# EAGLE board CT_schematic (EAGLE 7.6.0)

Size 100 x 80 mm. Coordinates in mm from the lower left corner, seen from the top.
Outline: 0,0 100,0 100,80 0,80 0,0
Copper layers (1*16): Top 0.035mm / dielectric 1.5mm / Bottom 0.035mm
Design rules "default": minimum track width 10mil, minimum drill 24mil, track to track 8mil, track to pad 8mil, pad to pad 8mil, via to via 8mil, smd to smd 8mil, copper to edge 40mil, drill to drill 8mil, minimum pad ring 10mil, minimum via ring 8mil, stop-mask expansion 4mil, vias tented up to drill 0mil, thermal gap 10mil

## Footprints (pad centres in the part's own frame; a part is rotated, then mirrored left to right if it is on the bottom)
C0603 = smd 0.8 x 0.8: 1 -0.762,0; 2 0.762,0
C0402 = smd 0.5 x 0.5: 1 -0.508,0; 2 0.508,0
EXV-9B = smd 2.718 x 1.778: 1 -2.108,0; 2 2.108,0
C1206 = smd 1.3 x 1.6: 1 -1.524,0; 2 1.524,0
C1210 = smd 1.2 x 2.5: 1 -1.524,0; 2 1.524,0
EXV-9H = smd 3.505 x 1.676: 1 -2.857,0; 2 2.857,0
L0603 = smd 0.8 x 0.8: 1 -0.762,0; 2 0.762,0
PJ-037B_PACKAGE = drill 3.7 square: 1 12,0 | drill 3.2 square: 2 6,0
R0603 = smd 0.8 x 0.8: 1 -0.762,0; 2 0.762,0
LQFP144 = smd 0.35 x 1.35: 1 -8.75,-10.625; 2 -8.25,-10.625; 3 -7.75,-10.625; 4 -7.25,-10.625; 5 -6.75,-10.625; 6 -6.25,-10.625; 7 -5.75,-10.625; 8 -5.25,-10.625; 9 -4.75,-10.625; 10 -4.25,-10.625; 11 -3.75,-10.625; 12 -3.25,-10.625; 13 -2.75,-10.62; 14 -2.25,-10.625; 15 -1.75,-10.625; 16 -1.25,-10.625; 17 -0.75,-10.625; 18 -0.25,-10.625; 19 0.25,-10.625; 20 0.75,-10.625; 21 1.25,-10.625; 22 1.75,-10.625; 23 2.25,-10.625; 24 2.75,-10.62; 25 3.25,-10.625; 26 3.75,-10.625; 27 4.25,-10.625; 28 4.75,-10.625; 29 5.25,-10.625; 30 5.75,-10.625; 31 6.25,-10.625; 32 6.75,-10.625; 33 7.25,-10.625; 34 7.75,-10.625; 35 8.25,-10.625; 36 8.75,-10.625; 73 8.75,10.625; 74 8.25,10.625; 75 7.75,10.625; 76 7.25,10.625; 77 6.75,10.625; 78 6.25,10.625; 79 5.75,10.625; 80 5.25,10.625; 81 4.75,10.625; 82 4.25,10.625; 83 3.75,10.625; 84 3.25,10.625; 85 2.75,10.625; 86 2.25,10.625; 87 1.75,10.625; 88 1.25,10.625; 89 0.75,10.625; 90 0.25,10.625; 91 -0.25,10.625; 92 -0.75,10.625; 93 -1.25,10.625; 94 -1.75,10.625; 95 -2.25,10.625; 96 -2.75,10.625; 97 -3.25,10.625; 98 -3.75,10.625; 99 -4.25,10.625; 100 -4.75,10.625; 101 -5.25,10.625; 102 -5.75,10.625; 103 -6.25,10.625; 104 -6.75,10.625; 105 -7.25,10.625; 106 -7.75,10.625; 107 -8.25,10.625; 108 -8.75,10.625 | smd 1.35 x 0.35: 37 10.625,-8.75; 38 10.625,-8.25; 39 10.625,-7.75; 40 10.625,-7.25; 41 10.625,-6.75; 42 10.625,-6.25; 43 10.625,-5.75; 44 10.625,-5.25; 45 10.625,-4.75; 46 10.625,-4.25; 47 10.625,-3.75; 48 10.625,-3.25; 49 10.625,-2.75; 50 10.625,-2.25; 51 10.625,-1.75; 52 10.625,-1.25; 53 10.625,-0.75; 54 10.625,-0.25; 55 10.625,0.25; 56 10.625,0.75; 57 10.625,1.25; 58 10.625,1.75; 59 10.625,2.25; 60 10.625,2.75; 61 10.625,3.25; 62 10.625,3.75; 63 10.625,4.25; 64 10.625,4.75; 65 10.625,5.25; 66 10.625,5.75; 67 10.625,6.25; 68 10.625,6.75; 69 10.625,7.25; 70 10.625,7.75; 71 10.625,8.25; 72 10.625,8.75; 109 -10.625,8.75; 110 -10.625,8.25; 111 -10.625,7.75; 112 -10.625,7.25; 113 -10.625,6.75; 114 -10.625,6.25; 115 -10.625,5.75; 116 -10.625,5.25; 117 -10.625,4.75; 118 -10.625,4.25; 119 -10.625,3.75; 120 -10.625,3.25; 121 -10.625,2.75; 122 -10.625,2.25; 123 -10.625,1.75; 124 -10.625,1.25; 125 -10.625,0.75; 126 -10.625,0.25; 127 -10.625,-0.25; 128 -10.625,-0.75; 129 -10.625,-1.25; 130 -10.625,-1.75; 131 -10.625,-2.25; 132 -10.625,-2.75; 133 -10.625,-3.25; 134 -10.625,-3.75; 135 -10.625,-4.25; 136 -10.625,-4.75; 137 -10.625,-5.25; 138 -10.625,-5.75; 139 -10.625,-6.25; 140 -10.625,-6.75; 141 -10.625,-7.25; 142 -10.625,-7.75; 143 -10.625,-8.25; 144 -10.625,-8.75
SOT-23-6 = smd 1.1 x 0.6: 1 -1.4,0.95; 2 -1.4,0; 3 -1.4,-0.95; 4 1.4,-0.95; 5 1.4,0; 6 1.4,0.95
TDFN-8/6MM = smd 0.3 x 0.75: 1 0,0; 2 0.5,0; 3 1,0; 4 1.5,0; 5 1.5,3; 6 1,3; 7 0.5,3; 8 0,3
SOIC-8 = smd 1.6 x 0.6: 1 -2.7,1.905 | smd 1.55 x 0.6: 2 -2.7,0.635; 3 -2.7,-0.635; 4 -2.7,-1.905; 5 2.7,-1.905; 6 2.7,-0.635; 7 2.7,0.635; 8 2.7,1.905
182-009-MALE = drill 1.194 pad 1.524 octagon: 1 -5.537,10.923; 2 -2.769,10.923; 3 0,10.923; 4 2.769,10.923; 5 5.537,10.923; 6 -4.153,8.08; 7 -1.384,8.08; 8 1.384,8.08; 9 4.153,8.08 | hole 3.048: -12.446,9.501; 12.446,9.501
LBGA-64 = smd 0.559 x 0.559: A1 -3.5,3.5; A2 -2.5,3.5; A3 -1.5,3.5; A4 -0.5,3.5; A5 0.5,3.5; A6 1.5,3.5; A7 2.5,3.5; A8 3.5,3.5; B1 -3.5,2.5; B2 -2.5,2.5; B3 -1.5,2.5; B4 -0.5,2.5; B5 0.5,2.5; B6 1.5,2.5; B7 2.5,2.5; B8 3.5,2.5; C1 -3.5,1.5; C2 -2.5,1.5; C3 -1.5,1.5; C4 -0.5,1.5; C5 0.5,1.5; C6 1.5,1.5; C7 2.5,1.5; C8 3.5,1.5; D1 -3.5,0.5; D2 -2.5,0.5; D3 -1.5,0.5; D4 -0.5,0.5; D5 0.5,0.5; D6 1.5,0.5; D7 2.5,0.5; D8 3.5,0.5; E1 -3.5,-0.5; E2 -2.5,-0.5; E3 -1.5,-0.5; E4 -0.5,-0.5; E5 0.5,-0.5; E6 1.5,-0.5; E7 2.5,-0.5; E8 3.5,-0.5; F1 -3.5,-1.5; F2 -2.5,-1.5; F3 -1.5,-1.5; F4 -0.5,-1.5; F5 0.5,-1.5; F6 1.5,-1.5; F7 2.5,-1.5; F8 3.5,-1.5; G1 -3.5,-2.5; G2 -2.5,-2.5; G3 -1.5,-2.5; G4 -0.5,-2.5; G5 0.5,-2.5; G6 1.5,-2.5; G7 2.5,-2.5; G8 3.5,-2.5; H1 -3.5,-3.5; H2 -2.5,-3.5; H3 -1.5,-3.5; H4 -0.5,-3.5; H5 0.5,-3.5; H6 1.5,-3.5; H7 2.5,-3.5; H8 3.5,-3.5
TFBGA-153 = smd 0.3 x 0.3: A1 -3.25,3.25; A2 -2.75,3.25; A3 -2.25,3.25; A4 -1.75,3.25; A5 -1.25,3.25; A6 -0.75,3.25; A7 -0.25,3.25; A8 0.25,3.25; A9 0.75,3.25; A10 1.25,3.25; A11 1.75,3.25; A12 2.25,3.25; A13 2.75,3.25; A14 3.25,3.25; B1 -3.25,2.75; B2 -2.75,2.75; B3 -2.25,2.75; B4 -1.75,2.75; B5 -1.25,2.75; B6 -0.75,2.75; B7 -0.25,2.75; B8 0.25,2.75; B9 0.75,2.75; B10 1.25,2.75; B11 1.75,2.75; B12 2.25,2.75; B13 2.75,2.75; B14 3.25,2.75; C1 -3.25,2.25; C2 -2.75,2.25; C3 -2.25,2.25; C4 -1.75,2.25; C5 -1.25,2.25; C6 -0.75,2.25; C7 -0.25,2.25; C8 0.25,2.25; C9 0.75,2.25; C10 1.25,2.25; C11 1.75,2.25; C12 2.25,2.25; C13 2.75,2.25; C14 3.25,2.25; D1 -3.25,1.75; D2 -2.75,1.75; D3 -2.25,1.75; D4 -1.75,1.75; D12 2.25,1.75; D13 2.75,1.75; D14 3.25,1.75; E1 -3.25,1.25; E2 -2.75,1.25; E3 -2.25,1.25; E5 -1.25,1.25; E6 -0.75,1.25; E7 -0.25,1.25; E8 0.25,1.25; E9 0.75,1.25; E10 1.25,1.25; E12 2.25,1.25; E13 2.75,1.25; E14 3.25,1.25; F1 -3.25,0.75; F2 -2.75,0.75; F3 -2.25,0.75; F5 -1.25,0.75; F10 1.25,0.75; F12 2.25,0.75; F13 2.75,0.75; F14 3.25,0.75; G1 -3.25,0.25; G2 -2.75,0.25; G3 -2.25,0.25; G5 -1.25,0.25; G10 1.25,0.25; G12 2.25,0.25; G13 2.75,0.25; G14 3.25,0.25; H1 -3.25,-0.25; H2 -2.75,-0.25; H3 -2.25,-0.25; H5 -1.25,-0.25; H10 1.25,-0.25; H12 2.25,-0.25; H13 2.75,-0.25; H14 3.25,-0.25; J1 -3.25,-0.75; J2 -2.75,-0.75; J3 -2.25,-0.75; J5 -1.25,-0.75; J10 1.25,-0.75; J12 2.25,-0.75; J13 2.75,-0.75; J14 3.25,-0.75; K1 -3.25,-1.25; K2 -2.75,-1.25; K3 -2.25,-1.25; K5 -1.25,-1.25; K6 -0.75,-1.25; K7 -0.25,-1.25; K8 0.25,-1.25; K9 0.75,-1.25; K10 1.25,-1.25; K12 2.25,-1.25; K13 2.75,-1.25; K14 3.25,-1.25; L1 -3.25,-1.75; L2 -2.75,-1.75; L3 -2.25,-1.75; L12 2.25,-1.75; L13 2.75,-1.75; L14 3.25,-1.75; M1 -3.25,-2.25; M2 -2.75,-2.25; M3 -2.25,-2.25; M4 -1.75,-2.25; M5 -1.25,-2.25; M6 -0.75,-2.25; M7 -0.25,-2.25; M8 0.25,-2.25; M9 0.75,-2.25; M10 1.25,-2.25; M11 1.75,-2.25; M12 2.25,-2.25; M13 2.75,-2.25; M14 3.25,-2.25; N1 -3.25,-2.75; N2 -2.75,-2.75; N3 -2.25,-2.75; N4 -1.75,-2.75; N5 -1.25,-2.75; N6 -0.75,-2.75; N7 -0.25,-2.75; N8 0.25,-2.75; N9 0.75,-2.75; N10 1.25,-2.75; N11 1.75,-2.75; N12 2.25,-2.75; N13 2.75,-2.75; N14 3.25,-2.75; P1 -3.25,-3.25; P2 -2.75,-3.25; P3 -2.25,-3.25; P4 -1.75,-3.25; P5 -1.25,-3.25; P6 -0.75,-3.25; P7 -0.25,-3.25; P8 0.25,-3.25; P9 0.75,-3.25; P10 1.25,-3.25; P11 1.75,-3.25; P12 2.25,-3.25; P13 2.75,-3.25; P14 3.25,-3.25
MICRO_USB_AB = smd 0.4 x 1.35: 1 1.3,0.26; 2 0.65,0.26; 3 0,0.26; 4 -0.65,0.26; 5 -1.3,0.26 | drill 0.6 pad 0.95 long: 6 4.175,-2.54; 7 -4.175,-2.54 | drill 0.7 pad 1.1 long: 8 -2.225,0.46; 9 2.225,0.46
SOT143B = smd 1 x 0.7: 1 -0.75,-1 | smd 0.6 x 0.7: 2 0.95,-1; 3 0.95,1; 4 -0.95,1
ABLS-25.000MHZ-B2F-T = smd 5.6 x 2.8: 1 -3.81,0; 2 5.69,0
ASEK = smd 1.4 x 1: 1 -1.1,-0.8; 2 1.1,-0.8; 3 1.1,0.8; 4 -1.1,0.8
LP2954 = smd 1.6 x 0.6: 1 -2.475,1.905 | smd 1.55 x 0.6: 2 -2.475,0.635; 3 -2.475,-0.635; 4 -2.475,-1.905; 5 2.475,-1.905; 6 2.475,-0.635; 7 2.475,0.635; 8 2.475,1.905
WSON-8 = smd 0.3 x 0.6: 1 -0.75,0; 2 0.05,0; 3 0.85,0; 4 1.65,0; 5 1.65,3.8; 6 0.85,3.8; 7 0.05,3.8; 8 -0.75,3.8 | smd 3 x 2.6: PAD 0.45,1.9
SON-6 = smd 0.55 x 0.3: 1 -0.355,0.5 | smd 0.52 x 0.3: 2 -0.37,0; 3 -0.37,-0.5; 4 0.37,-0.5; 5 0.37,0; 6 0.37,0.5
SW_4-1437565-2 = smd 1.4 x 2.1: 1 -2.23,4.55; 2 -2.23,-4.55; 3 2.23,4.55; 4 2.23,-4.55
LGM67K-G1J2-24-Z = smd 0.8 x 1.4: A -2,0; C 0,0
NC7SZ125M5X = smd 1.3 x 0.7: 1 -1.3,0.95; 2 -1.3,0; 3 -1.3,-0.95; 4 1.3,-0.95; 5 1.3,0.95

## Placement (x,y rotation side)
C1  1e-06  [C0603]  -57.15,83.82 0 top  (outside the outline)
C2  1e-07  [C0603]  -60.96,83.82 0 top  (outside the outline)
C3  1e-07  [C0603]  -64.77,83.82 0 top  (outside the outline)
C4  1e-07  [C0603]  -68.58,83.82 0 top  (outside the outline)
C5  1e-07  [C0603]  -72.39,83.82 0 top  (outside the outline)
C6  1e-07  [C0603]  -76.2,83.82 0 top  (outside the outline)
C7  1e-07  [C0603]  -80.01,83.82 0 top  (outside the outline)
C8  1e-07  [C0603]  -83.82,83.82 0 top  (outside the outline)
C9  1e-07  [C0603]  -15.24,88.9 0 top  (outside the outline)
C10  1e-07  [C0603]  -19.05,88.9 0 top  (outside the outline)
C11  1e-07  [C0603]  -22.86,88.9 0 top  (outside the outline)
C12  1e-07  [C0603]  -26.67,88.9 0 top  (outside the outline)
C13  1e-07  [C0603]  -30.48,88.9 0 top  (outside the outline)
C14  4.7e-06  [C0603]  -34.29,83.82 0 top  (outside the outline)
C15  2.2e-06  [C0603]  -38.1,83.82 0 top  (outside the outline)
C16  2.2e-06  [C0603]  -41.91,83.82 0 top  (outside the outline)
C17  1e-08  [C0603]  -34.29,88.9 0 top  (outside the outline)
C18  1e-06  [C0603]  -38.1,88.9 0 top  (outside the outline)
C19  1e-11  [C0402]  -19.05,93.98 0 top  (outside the outline)
C20  1e-11  [C0402]  -22.86,93.98 0 top  (outside the outline)
C21  1e-08  [C0402]  -26.67,93.98 0 top  (outside the outline)
C22  1e-06  [C0603]  -41.91,88.9 0 top  (outside the outline)
C23  1e-06  [C0603]  -45.72,88.9 0 top  (outside the outline)
C24  1e-08  [C0402]  -30.48,93.98 0 top  (outside the outline)
C25  1e-08  [C0402]  -34.29,93.98 0 top  (outside the outline)
C26  1e-07  [C0402]  -38.1,93.98 0 top  (outside the outline)
C27  2.2e-06  [C0603]  -45.72,83.82 0 top  (outside the outline)
C28  2.2e-06  [C0603]  -49.53,83.82 0 top  (outside the outline)
C29  1e-07  [C0402]  -41.91,93.98 0 top  (outside the outline)
C30  1e-07  [C0402]  -45.72,93.98 0 top  (outside the outline)
C31  2.2e-06  [C0603]  -53.34,83.82 0 top  (outside the outline)
C32  1e-08  [C0402]  -49.53,93.98 0 top  (outside the outline)
C33  1e-06  [EXV-9B]  -63.5,64.77 0 top  (outside the outline)
C34  2.2e-06  [EXV-9B]  -72.39,64.77 0 top  (outside the outline)
C35  1e-08  [C0402]  -53.34,93.98 0 top  (outside the outline)
C36  1e-05  [C1206]  -55.88,64.77 0 top  (outside the outline)
C37  1e-05  [C1210]  -49.53,66.04 0 top  (outside the outline)
C38  1e-07  [C0402]  -57.15,93.98 0 top  (outside the outline)
C39  0.0001  [EXV-9H]  -58.42,57.15 0 top  (outside the outline)
C40  0.0001  [EXV-9H]  -69.85,57.15 0 top  (outside the outline)
C41  1e-08  [C0402]  -60.96,93.98 0 top  (outside the outline)
C42  1e-08  [C0402]  -64.77,93.98 0 top  (outside the outline)
C43  1e-08  [C0402]  -68.58,93.98 0 top  (outside the outline)
F1  240.0  [L0603]  -49.53,88.9 0 top  (outside the outline)
J1  PJ-037B  [PJ-037B_PACKAGE]  -55.88,30.48 0 top  (outside the outline)
R2  1000.0  [R0603]  -53.34,88.9 0 top  (outside the outline)
R4  4700.0  [R0603]  -57.15,88.9 0 top  (outside the outline)
R5  4700.0  [R0603]  -60.96,88.9 0 top  (outside the outline)
R6  4700.0  [R0603]  -64.77,88.9 0 top  (outside the outline)
R7  2200.0  [R0603]  -68.58,88.9 0 top  (outside the outline)
R8  2200.0  [R0603]  -72.39,88.9 0 top  (outside the outline)
R9  47000.0  [R0603]  -71.12,72.39 0 top  (outside the outline)
R10  10000.0  [R0603]  -76.2,72.39 0 top  (outside the outline)
R11  10000.0  [R0603]  -81.28,72.39 0 top  (outside the outline)
R12  10000.0  [R0603]  -15.24,78.74 0 top  (outside the outline)
R13  120.0  [R0603]  -76.2,88.9 0 top  (outside the outline)
R14  10000.0  [R0603]  -20.32,78.74 0 top  (outside the outline)
R15  10000.0  [R0603]  -25.4,78.74 0 top  (outside the outline)
R16  10000.0  [R0603]  -30.48,78.74 0 top  (outside the outline)
R17  10000.0  [R0603]  -35.56,78.74 0 top  (outside the outline)
R18  10000.0  [R0603]  -40.64,78.74 0 top  (outside the outline)
R19  34000.0  [R0603]  -45.72,78.74 0 top  (outside the outline)
R20  34000.0  [R0603]  -50.8,78.74 0 top  (outside the outline)
R21  34000.0  [R0603]  -55.88,78.74 0 top  (outside the outline)
R22  34000.0  [R0603]  -60.96,78.74 0 top  (outside the outline)
R23  34000.0  [R0603]  -66.04,78.74 0 top  (outside the outline)
R24  34000.0  [R0603]  -71.12,78.74 0 top  (outside the outline)
R25  34000.0  [R0603]  -76.2,78.74 0 top  (outside the outline)
R26  34000.0  [R0603]  -81.28,78.74 0 top  (outside the outline)
R27  34000.0  [R0603]  -15.24,83.82 0 top  (outside the outline)
R28  34000.0  [R0603]  -20.32,83.82 0 top  (outside the outline)
R29  100000.0  [R0603]  -40.64,72.39 0 top  (outside the outline)
R30  100000.0  [R0603]  -45.72,72.39 0 top  (outside the outline)
R31  164658.62  [R0603]  -35.56,72.39 0 top  (outside the outline)
R32  100000.0  [R0603]  -50.8,72.39 0 top  (outside the outline)
R33  100000.0  [R0603]  -55.88,72.39 0 top  (outside the outline)
R34  3900.0  [R0603]  -80.01,88.9 0 top  (outside the outline)
R35  1000.0  [R0603]  -83.82,88.9 0 top  (outside the outline)
R36  10000.0  [R0603]  -25.4,83.82 0 top  (outside the outline)
R37  10000.0  [R0603]  -30.48,83.82 0 top  (outside the outline)
R38  9100.0  [R0603]  -15.24,93.98 0 top  (outside the outline)
R39  680000.0  [R0603]  -60.96,72.39 0 top  (outside the outline)
R40  120000.0  [R0603]  -66.04,72.39 0 top  (outside the outline)
U1  STM32F215ZET6  [LQFP144]  -24.13,11.43 0 top  (outside the outline)
U2  MAX4995AAUT+T  [SOT-23-6]  -80.01,64.77 0 top  (outside the outline)
U3  24AA01T-I/MNY  [TDFN-8/6MM]  -43.18,44.45 0 top  (outside the outline)
U4  MCP2562-E/SN  [SOIC-8]  -72.39,45.72 0 top  (outside the outline)
U5  182-009-113R531  [182-009-MALE]  -59.69,6.35 0 top  (outside the outline)
U6  mt28ew512aba1HPC-0AAT  [LBGA-64]  -33.02,30.48 0 top  (outside the outline)
U7  mtfc4gmcdm  [TFBGA-153]  -20.32,31.75 0 top  (outside the outline)
U8  47590-0001  [MICRO_USB_AB]  -64.77,30.48 0 top  (outside the outline)
U9  prtr5v0u2ax  [SOT143B]  -81.28,93.98 0 top  (outside the outline)
U10  ABLS-25.000MHZ-B2F-T  [ABLS-25.000MHZ-B2F-T]  -26.67,66.04 0 top  (outside the outline)
U11  ASEK-32.768KHz-ECST  [ASEK]  -49.53,57.15 0 top  (outside the outline)
U12  LP2954AIMX/NOPB  [LP2954]  -58.42,45.72 0 top  (outside the outline)
U13  LP3878SDX-ADJ/NOPB  [WSON-8]  -30.48,55.88 0 top  (outside the outline)
U14  TPS3895ADRYR  [SON-6]  -13.97,97.79 0 top  (outside the outline)
U15  4-1437565-2  [SW_4-1437565-2]  -27.94,46.99 0 top  (outside the outline)
U16  Q65110A2395  [LGM67K-G1J2-24-Z]  -38.1,66.04 0 top  (outside the outline)
U17  nc7sz125m5x  [NC7SZ125M5X]  -15.24,72.39 0 top  (outside the outline)
U18  nc7sz125m5x  [NC7SZ125M5X]  -21.59,72.39 0 top  (outside the outline)
U19  nc7sz125m5x  [NC7SZ125M5X]  -27.94,72.39 0 top  (outside the outline)

## Library data of the parts
C1-C43 F1 J1 R2 R4-R40 U1-U19 = circuit_tree

## Nets
CLK_CRYSTAL_U1_23: C19.1 U1.23 U10.1
CLK_CRYSTAL_U1_24: C20.1 U1.24 U10.2
CLK_U1_8: U1.8 U11.3
GND: C1.2 C2.2 C3.2 C4.2 C5.2 C6.2 C7.2 C8.2 C9.2 C10.2 C11.2 C12.2 C13.2 C14.2 C15.2 C16.2 C17.2 C18.2 C19.2 C20.2 C21.2 C22.2 C23.2 C24.2 C25.2 C26.2 C27.2 C28.2 C29.2 C30.2 C31.2 C32.2 C33.2 C34.2 C35.2 C36.2 C37.2 C38.2 C39.2 C40.2 C41.2 C42.2 C43.2 J1.2 R2.2 R9.2 R10.2 R12.2 R32.2 R35.2 R38.2 R40.2 U1.16 U1.31 U1.38 U1.51 U1.61 U1.83 U1.94 U1.107 U1.120 U1.130 U2.2 U3.4 U4.2 U4.8 U5.5 U6.E8 U6.H2 U6.H7 U7.C4 U7.E7 U7.G5 U7.H10 U7.K8 U7.N2 U7.N5 U7.P4 U7.P6 U8.5 U8.6 U8.7 U8.8 U8.9 U9.1 U11.2 U12.4 U13.3 U13.PAD U14.2 U16.C U17.1 U17.3 U18.1 U18.3 U19.1 U19.3
NET_U1_25: R6.1 U1.25 U19.4
NET_U1_33: C17.1 C18.1 F1.1 U1.32 U1.33
NET_U1_71: C15.1 U1.71
NET_U1_106: C16.1 U1.106
NET_U1_136: R7.1 U1.136 U3.6
NET_U1_137: R8.1 U1.137 U3.5
NET_U1_138: R10.1 U1.138
NET_U1_141: U16.A
NET_U1_142: U15.3 U15.4
NET_U2_1: U1.101 U2.1
NET_U2_3: R9.1 U2.3
NET_U4_6: R13.2 U4.6
NET_U5_2: R13.2 U4.6 U5.2
NET_U5_3: R13.1 U4.7 U5.3
NET_U6_B4: R17.1 U6.B4
NET_U6_B5: R4.1 U6.B5 U17.4
NET_U6_F7: R18.1 U6.F7
NET_U7_C2: C28.1 C29.1 U7.C2
NET_U7_K5: R5.1 U7.K5 U18.4
NET_U12_3: R30.1 U12.3
NET_U12_5: R29.1 U12.5
NET_U12_7: R31.2 R32.1 U12.7
NET_U13_1: C35.1 U13.1
NET_U13_6: R34.2 R35.1 U13.6
NET_U13_8: R33.1 U13.8
NET_U14_1: R37.1 R38.1 U14.1
NET_U14_3: R39.2 R40.1 U14.3
NET_U14_4: R36.1 U14.4 U17.2 U18.2 U19.2
NET_U15_1: R2.1 U15.1 U15.2
PROC_CAN1_RX: U1.103 U4.4
PROC_CAN1_TX: U1.104 U4.1
PROC_FSMC_A0: U1.10 U6.E2
PROC_FSMC_A1: U1.11 U6.D2
PROC_FSMC_A2: U1.12 U6.C2
PROC_FSMC_A3: U1.13 U6.A2
PROC_FSMC_A4: U1.14 U6.B2
PROC_FSMC_A5: U1.15 U6.D3
PROC_FSMC_A6: U1.50 U6.C3
PROC_FSMC_A7: U1.53 U6.A3
PROC_FSMC_A8: U1.54 U6.B6
PROC_FSMC_A9: U1.55 U6.A6
PROC_FSMC_A10: U1.56 U6.C6
PROC_FSMC_A11: U1.57 U6.D6
PROC_FSMC_A12: U1.87 U6.B7
PROC_FSMC_A13: U1.88 U6.A7
PROC_FSMC_A14: U1.89 U6.C7
PROC_FSMC_A15: U1.90 U6.D7
PROC_FSMC_A16: U1.80 U6.E7
PROC_FSMC_A17: U1.81 U6.B3
PROC_FSMC_A18: U1.82 U6.C4
PROC_FSMC_A19: U1.2 U6.D5
PROC_FSMC_A20: U1.3 U6.D4
PROC_FSMC_A21: U1.4 U6.C5
PROC_FSMC_A22: U1.5 U6.B8
PROC_FSMC_A23: U1.1 U6.C8
PROC_FSMC_A24: U1.128 U6.F8
PROC_FSMC_D0: U1.85 U6.E3
PROC_FSMC_D1: U1.86 U6.H3
PROC_FSMC_D2: U1.114 U6.E4
PROC_FSMC_D3: U1.115 U6.H4
PROC_FSMC_D4: U1.58 U6.H5
PROC_FSMC_D5: U1.59 U6.E5
PROC_FSMC_D6: U1.60 U6.H6
PROC_FSMC_D7: U1.63 U6.E6
PROC_FSMC_D8: U1.64 U6.F3
PROC_FSMC_D9: U1.65 U6.G3
PROC_FSMC_D10: U1.66 U6.F4
PROC_FSMC_D11: U1.67 U6.G4
PROC_FSMC_D12: U1.68 U6.F5
PROC_FSMC_D13: U1.77 U6.G6
PROC_FSMC_D14: U1.78 U6.F6
PROC_FSMC_D15: U1.79 U6.G7
PROC_FSMC_NE4: R14.1 U1.127 U6.F2
PROC_FSMC_NOE: R15.1 U1.118 U6.G2
PROC_FSMC_NWAIT: U1.122 U6.A4
PROC_FSMC_NWE: R16.1 U1.119 U6.A5
PROC_GPIO_TO_U1_USB_FAULT: R11.1 U1.9 U2.6
PROC_GPIO_TO_U1_VBUS_EN: R12.1 U1.7 U2.4
PROC_SDIO_CK: R28.1 U1.113 U7.M6
PROC_SDIO_CMD: R27.1 U1.116 U7.M5
PROC_SDIO_D0: R19.1 U1.98 U7.A3
PROC_SDIO_D1: R20.1 U1.99 U7.A4
PROC_SDIO_D2: R21.1 U1.111 U7.A5
PROC_SDIO_D3: R22.1 U1.112 U7.B2
PROC_SDIO_D4: R23.1 U1.139 U7.B3
PROC_SDIO_D5: R24.1 U1.140 U7.B4
PROC_SDIO_D6: R25.1 U1.96 U7.B5
PROC_SDIO_D7: R26.1 U1.97 U7.B6
PROC_USB_OTG_HS_DM: U1.75 U8.2 U9.3
PROC_USB_OTG_HS_DP: U1.76 U8.3 U9.2
PROC_USB_OTG_HS_ID: U1.73 U8.4
PROC_USB_OTG_HS_VBUS: U1.74 U8.1 U9.4
VCC_S1_10V6: C33.1 C36.1 C39.1 C40.1 J1.1 R30.2 R33.2 U12.8 U13.4
VCC_TIER1_3V3: C1.1 C2.1 C3.1 C4.1 C5.1 C6.1 C7.1 C8.1 C9.1 C10.1 C11.1 C12.1 C13.1 C14.1 C21.1 C23.1 C24.1 C25.1 C26.1 C27.1 C30.1 C31.1 C32.1 C34.1 C38.1 C41.1 C42.1 C43.1 F1.2 R4.2 R5.2 R6.2 R7.2 R8.2 R11.2 R14.2 R15.2 R16.2 R17.2 R18.2 R19.2 R20.2 R21.2 R22.2 R23.2 R24.2 R25.2 R26.2 R27.2 R28.2 R29.2 R31.1 R36.2 R37.2 R39.1 U1.6 U1.17 U1.30 U1.39 U1.52 U1.62 U1.72 U1.84 U1.95 U1.108 U1.121 U1.131 U1.144 U3.7 U3.8 U4.5 U6.D8 U6.F1 U6.G5 U7.C6 U7.E6 U7.F5 U7.J10 U7.K9 U7.M4 U7.N4 U7.P3 U7.P5 U11.4 U12.1 U14.6 U17.5 U18.5 U19.5
VCC_TIER1_5V0: C22.1 C37.1 R34.1 U2.5 U4.3 U13.5

## Tracks (layer width: path | path; a pad name or v marks a point on that pad's centre or on a via)
CLK_CRYSTAL_U1_23  (2 unrouted)
CLK_CRYSTAL_U1_24  (2 unrouted)
CLK_U1_8  (1 unrouted)
GND  (96 unrouted)
NET_U1_25  (2 unrouted)
NET_U1_33  (4 unrouted)
NET_U1_71  (1 unrouted)
NET_U1_106  (1 unrouted)
NET_U1_136  (2 unrouted)
NET_U1_137  (2 unrouted)
NET_U1_138  (1 unrouted)
NET_U1_142  (1 unrouted)
NET_U2_1  (1 unrouted)
NET_U2_3  (1 unrouted)
NET_U4_6  (1 unrouted)
NET_U5_2  (2 unrouted)
NET_U5_3  (2 unrouted)
NET_U6_B4  (1 unrouted)
NET_U6_B5  (2 unrouted)
NET_U6_F7  (1 unrouted)
NET_U7_C2  (2 unrouted)
NET_U7_K5  (2 unrouted)
NET_U12_3  (1 unrouted)
NET_U12_5  (1 unrouted)
NET_U12_7  (2 unrouted)
NET_U13_1  (1 unrouted)
NET_U13_6  (2 unrouted)
NET_U13_8  (1 unrouted)
NET_U14_1  (2 unrouted)
NET_U14_3  (2 unrouted)
NET_U14_4  (4 unrouted)
NET_U15_1  (2 unrouted)
PROC_CAN1_RX  (1 unrouted)
PROC_CAN1_TX  (1 unrouted)
PROC_FSMC_A0  (1 unrouted)
PROC_FSMC_A1  (1 unrouted)
PROC_FSMC_A2  (1 unrouted)
PROC_FSMC_A3  (1 unrouted)
PROC_FSMC_A4  (1 unrouted)
PROC_FSMC_A5  (1 unrouted)
PROC_FSMC_A6  (1 unrouted)
PROC_FSMC_A7  (1 unrouted)
PROC_FSMC_A8  (1 unrouted)
PROC_FSMC_A9  (1 unrouted)
PROC_FSMC_A10  (1 unrouted)
PROC_FSMC_A11  (1 unrouted)
PROC_FSMC_A12  (1 unrouted)
PROC_FSMC_A13  (1 unrouted)
PROC_FSMC_A14  (1 unrouted)
PROC_FSMC_A15  (1 unrouted)
PROC_FSMC_A16  (1 unrouted)
PROC_FSMC_A17  (1 unrouted)
PROC_FSMC_A18  (1 unrouted)
PROC_FSMC_A19  (1 unrouted)
PROC_FSMC_A20  (1 unrouted)
PROC_FSMC_A21  (1 unrouted)
PROC_FSMC_A22  (1 unrouted)
PROC_FSMC_A23  (1 unrouted)
PROC_FSMC_A24  (1 unrouted)
PROC_FSMC_D0  (1 unrouted)
PROC_FSMC_D1  (1 unrouted)
PROC_FSMC_D2  (1 unrouted)
PROC_FSMC_D3  (1 unrouted)
PROC_FSMC_D4  (1 unrouted)
PROC_FSMC_D5  (1 unrouted)
PROC_FSMC_D6  (1 unrouted)
PROC_FSMC_D7  (1 unrouted)
PROC_FSMC_D8  (1 unrouted)
PROC_FSMC_D9  (1 unrouted)
PROC_FSMC_D10  (1 unrouted)
PROC_FSMC_D11  (1 unrouted)
PROC_FSMC_D12  (1 unrouted)
PROC_FSMC_D13  (1 unrouted)
PROC_FSMC_D14  (1 unrouted)
PROC_FSMC_D15  (1 unrouted)
PROC_FSMC_NE4  (2 unrouted)
PROC_FSMC_NOE  (2 unrouted)
PROC_FSMC_NWAIT  (1 unrouted)
PROC_FSMC_NWE  (2 unrouted)
PROC_GPIO_TO_U1_USB_FAULT  (2 unrouted)
PROC_GPIO_TO_U1_VBUS_EN  (2 unrouted)
PROC_SDIO_CK  (2 unrouted)
PROC_SDIO_CMD  (2 unrouted)
PROC_SDIO_D0  (2 unrouted)
PROC_SDIO_D1  (2 unrouted)
PROC_SDIO_D2  (2 unrouted)
PROC_SDIO_D3  (2 unrouted)
PROC_SDIO_D4  (2 unrouted)
PROC_SDIO_D5  (2 unrouted)
PROC_SDIO_D6  (2 unrouted)
PROC_SDIO_D7  (2 unrouted)
PROC_USB_OTG_HS_DM  (2 unrouted)
PROC_USB_OTG_HS_DP  (2 unrouted)
PROC_USB_OTG_HS_ID  (1 unrouted)
PROC_USB_OTG_HS_VBUS  (2 unrouted)
VCC_S1_10V6  (8 unrouted)
VCC_TIER1_3V3  (88 unrouted)
VCC_TIER1_5V0  (5 unrouted)